# Altium PCB Stepper_control_board_v100.PcbDoc
Units mil, origin at the board's own origin, x right, y up, seen from the top; angles counter-clockwise.
Board outline 2510 x 1585 mil, 2 copper layers (Top Layer, Bottom Layer), stack 86.615 mil thick; 7 components, 0 nets, 98 pads, 18 vias.
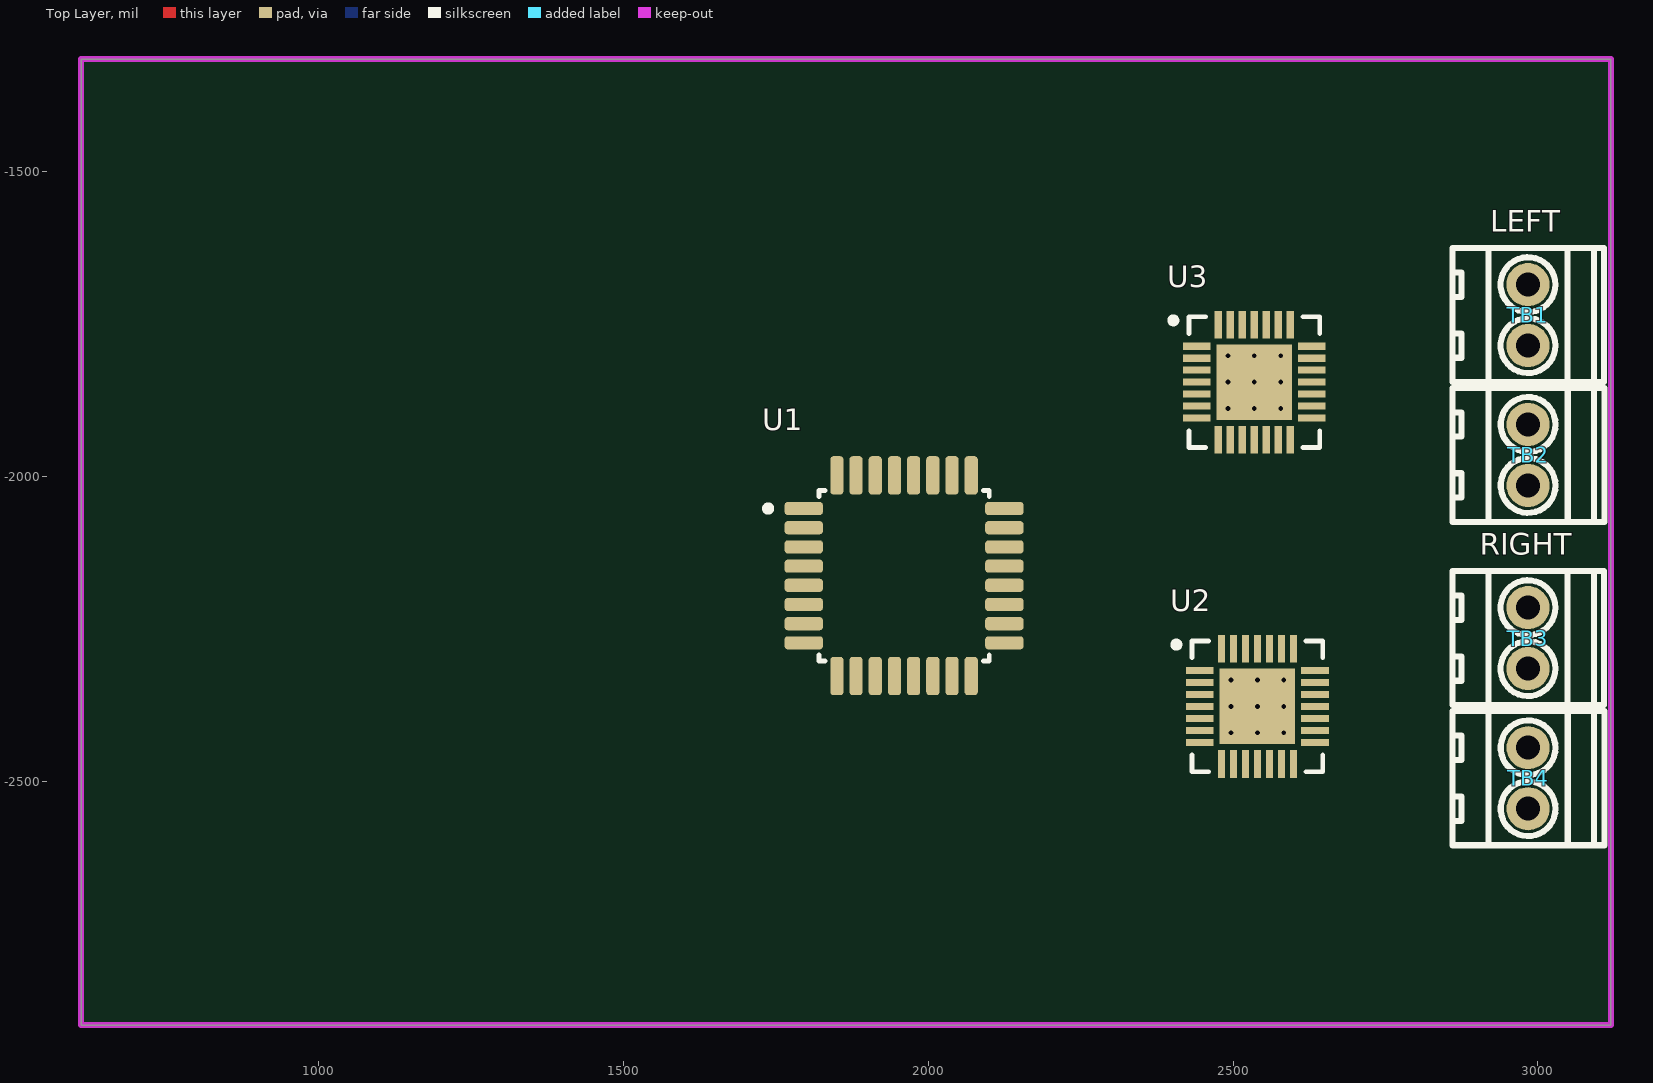
[diagram p0: Top Layer view]
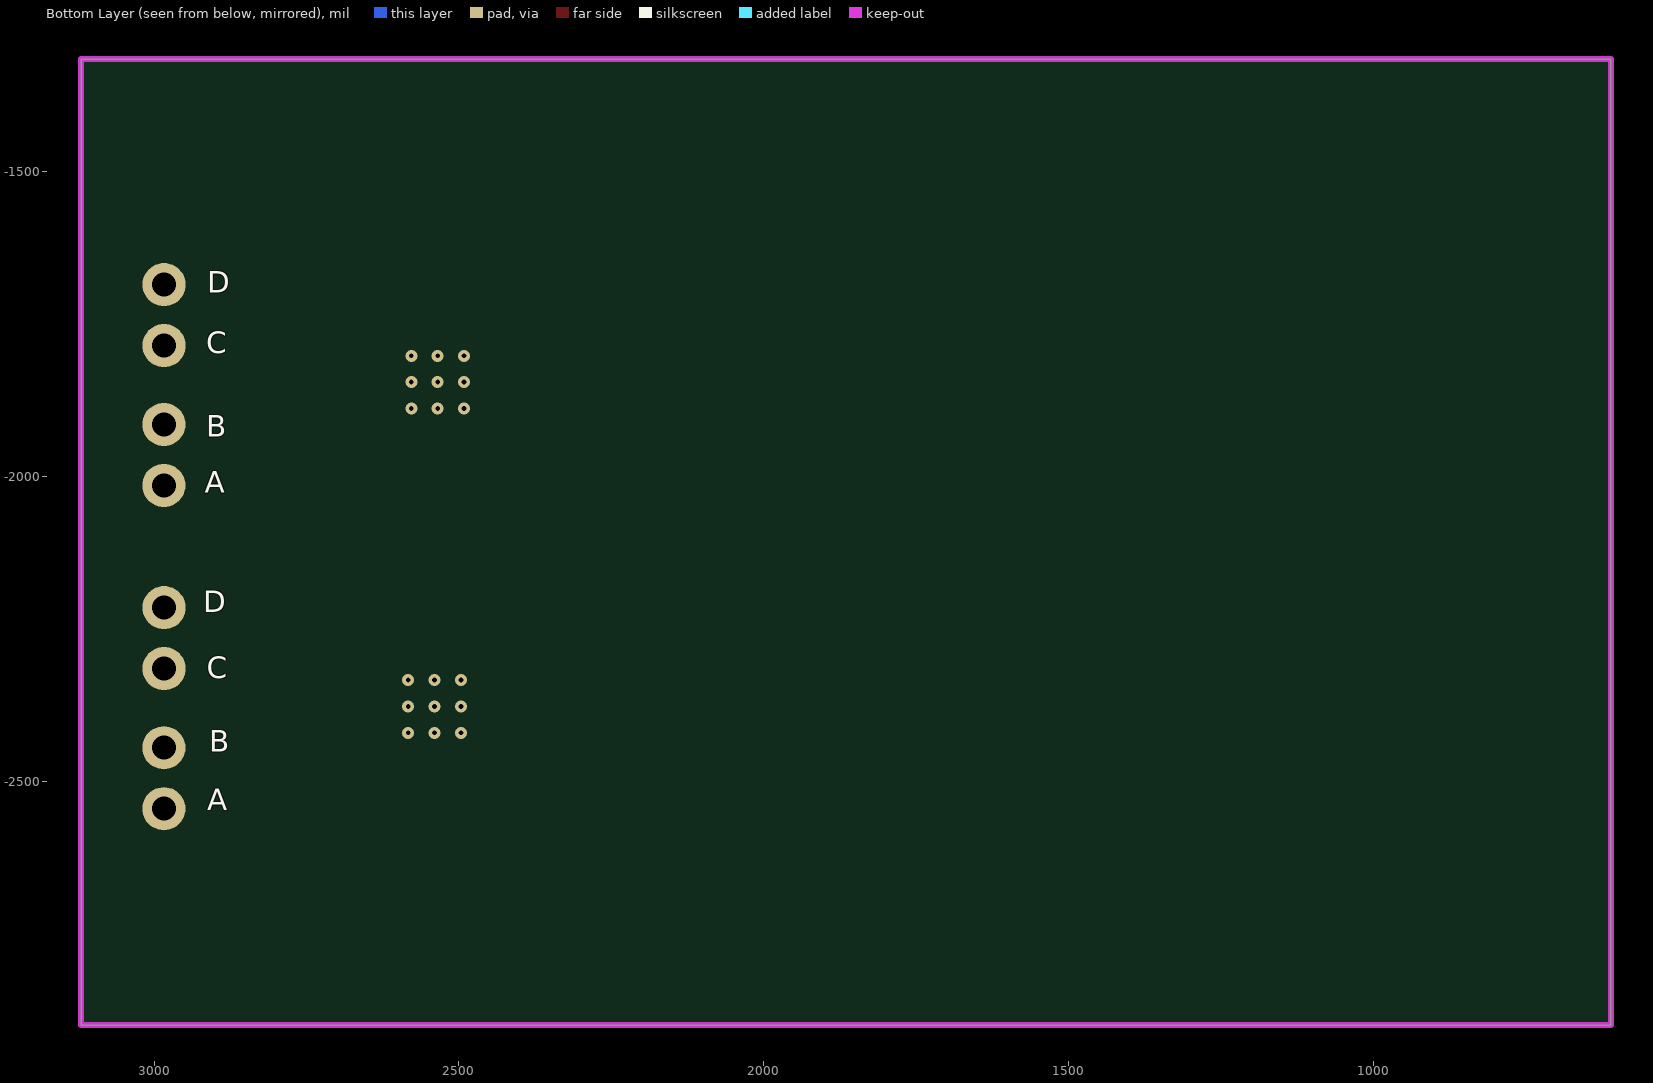
[diagram p1: Bottom Layer view, seen from below]

## Layer stack, top to bottom
Top Solder: solder mask 0.394, Solder Resist, Dk 3.5
Top Layer: signal copper 13.78
Dielectric 1: core 59.055, FR-4, Dk 4.2
Bottom Layer: signal copper 13.78
Solder Side: solder mask 0.394, Solder Resist, Dk 3.5

## Board outline
610,-2900 3120,-2900 3120,-1315 610,-1315

## Design rules (kind name [scope] priority, off if disabled: settings)
Clearance "Clearance Poly" [InPoly] p1: gap=16 ignorepadtopadclearanceinfootprint=FALSE except(0: Arc-Hole Track-Hole SMDPad-Hole THPad-Hole Via-Hole Fill-Hole Poly-Hole Region-Hole Text-Hole)
Clearance [All] p2: gap=4 ignorepadtopadclearanceinfootprint=FALSE
DiffPairsRouting [All] p1: maxlimit=10 minlimit=10 mostfreqgap=10 toplayer_minwidth=10 toplayer_maxwidth=10 toplayer_prefwidth=10 bottomlayer_minwidth=10 bottomlayer_maxwidth=10 bottomlayer_prefwidth=10 maxuncoupledlength=500
HoleSize [All] p1: absolutevalues=TRUE maxlimit=500 minlimit=1 maxpercent=80.000 minpercent=20.000
MinimumSolderMaskSliver [All] p1: minsoldermaskwidth=1
PolygonConnect PolygonConnect_Via [IsVia] p1: connectstyle=Direct reliefconductorwidth=10 reliefentries=4 polygonreliefangle="90 Angle" airgapwidth=10
PolygonConnect [All] p2: connectstyle=Relief reliefconductorwidth=16 reliefentries=4 polygonreliefangle="90 Angle" airgapwidth=16
RoutingVias [All] p1: holewidth=12 width=24 viastyle="Through Hole" minholewidth=12 minwidth=24 maxholewidth=12 maxwidth=24
SilkToSilkClearance [All] p1: silktosilkclearance=5
SilkToSolderMaskClearance [IsPad] p1: minsilkscreentomaskgap=5 clearancetoexposedcopper=TRUE
SolderMaskExpansion [All] p1: expansion=4
Width [All] p1: maxlimit=80 minlimit=10 preferedwidth=10
25 further rules are at their usual default settings.

## Components (designator, comment, footprint, x,y, rotation, side; value= is the part's Value field where it differs from the comment)
TB1 "282834-2" "SCREW TERMINAL 2.54" 2984,-1735 r90 top
TB2 "282834-2" "SCREW TERMINAL 2.54" 2984.25,-1964.48 r90 top
TB3 "282834-2" "SCREW TERMINAL 2.54" 2984,-2265 r90 top
TB4 "282834-2" "SCREW TERMINAL 2.54" 2984.25,-2494.88 r90 top
U1 "ATmega328PB/48PB/88PB/168PB" QFP32P80_900X900X120L60X37N 1960.24,-2162.6 r0 top
U2 "A4988SETTR-T" QFN50P500X500X100_HS-29N 2540,-2377 r0 top
U3 "A4988SETTR-T" QFN50P500X500X100_HS-29N 2535,-1845 r0 top

## Footprints (in the part's own frame and the unit in brackets; to place one, negate y for a bottom-side part, rotate by r counter-clockwise, add the part's x,y. Pads: shape width x height; smd on the part's side, far side on the other; paste and mask are expansions set on the pad)
QFN50P500X500X100_HS-29N [mm] "QFN, 28-Leads, Body 5,00x5,00mm, Pitch 0,50mm, Thermal Pad 3,15x3,15mm, IPC Medium Density"
  rect 1.15x0.3 smd: 1(-2.4,1.5) 2(-2.4,1) 3(-2.4,0.5) 4(-2.4,0) 5(-2.4,-0.5) 6(-2.4,-1) 7(-2.4,-1.5) 15(2.4,-1.5) 16(2.4,-1) 17(2.4,-0.5) 18(2.4,0) 19(2.4,0.5) 20(2.4,1) 21(2.4,1.5)
  rect 0.3x1.15 smd: 8(-1.5,-2.4) 9(-1,-2.4) 10(-0.5,-2.4) 11(0,-2.4) 12(0.5,-2.4) 13(1,-2.4) 14(1.5,-2.4) 22(1.5,2.4) 23(1,2.4) 24(0.5,2.4) 25(0,2.4) 26(-0.5,2.4) 27(-1,2.4) 28(-1.5,2.4)
  rect 3.15x3.15 smd: 29(0,0)
  silkscreen extent -3.5,-2.73 2.73,2.73, body extent -2.58,-2.57 2.57,2.58, height 1
QFP32P80_900X900X120L60X37N [mm] "Quad Flat Pack (QFP), 0.80 mm pitch; square, 8 pin X 8 pin, 7.00 mm L X 7.00 mm W X 1.20 mm H body"
  rrect51% 1.6x0.55 smd: 1(-4.18,2.8) 2(-4.18,2) 3(-4.18,1.2) 4(-4.18,0.4) 5(-4.18,-0.4) 6(-4.18,-1.2) 7(-4.18,-2) 8(-4.18,-2.8) 17(4.18,-2.8) 18(4.18,-2) 19(4.18,-1.2) 20(4.18,-0.4) 21(4.18,0.4) 22(4.18,1.2) 23(4.18,2) 24(4.18,2.8)
  rrect51% 0.55x1.6 smd: 9(-2.8,-4.18) 10(-2,-4.18) 11(-1.2,-4.18) 12(-0.4,-4.18) 13(0.4,-4.18) 14(1.2,-4.18) 15(2,-4.18) 16(2.8,-4.18) 25(2.8,4.18) 26(2,4.18) 27(1.2,4.18) 28(0.4,4.18) 29(-0.4,4.18) 30(-1.2,4.18) 31(-2,4.18) 32(-2.8,4.18)
  silkscreen extent -5.79,-3.55 3.55,3.55, body extent -4.8,-4.8 4.8,4.8, height 1.11
"SCREW TERMINAL 2.54" [mm]
  round 1.8 hole 1: 1(-1.27,0) 2(1.27,0)
  silkscreen extent -2.79,-3.17 2.79,3.15, body extent -2.77,-3.11 2.77,3.09, height 8.5

## Part data
TB1 TB2 TB3 TB4: library part 0100000003800, "TERM BLOCK 2POS SIDE ENT 2.54MM", Color=Green, Manufacturer="TE Connectivity AMP Connectors", Assembly=TH, Barcode=0100000003800, Category="Connectors, Interconnects", Datasheet URL=http://www.te.com/commerce/DocumentDelivery/DDEController?Action=srchrtrv&DocNm=282834&DocType=Customer+Drawing&DocLang=English, Family="TERMINAL BLOCK", Features=-, id=56, item_id=646, Manufacturer Part Number=282834-2, Mounting Type="Through Hole", Number of Levels=1, Part Type="Connectors, Electromechanical", Pitch="0.100\" (2.54mm)", Positions Per Level=2
U1: library part 3500000139108, "IC MCU 8BIT 8KB FLASH 32TQFP", Manufacturer="Microchip Technology", Manufacturer Part Number=ATMEGA88PB-AU, Package Case=32-TQFP, Voltage  Supply Vcc Vdd="1.8 V ~ 5.5 V", Assembly=SMD, Barcode=3500000139108, Category="Integrated Circuits (ICs)", Connectivity="I²C, SPI, UART/USART", Core Processor=AVR, Core Size=8-Bit, Datasheet URL=http://www.atmel.com/Images/Atmel-42176-ATmega48PB-88PB-168PB_Datasheet.pdf, Family=Microcontrollers, id=1142, item_id=12043, Number of I O=27, Part Type="Integrated Circuits", Peripherals="Brown-out Detect/Reset, POR, PWM, WDT", Program Memory Size="8KB (4K x 16)", Program Memory Type=FLASH, Speed=20MHz
U2 U3: library part 0100000079072, "IC MOTOR DRIVER PAR 28QFN", Current  Output=2A, Manufacturer="Allegro MicroSystems, LLC", Package Case="28-VFQFN Exposed Pad", Voltage Load="8 V ~ 35 V", Voltage  Supply="3 V ~ 5.5 V", Applications="General Purpose", Assembly=SMD, Barcode=0100000079072, Category="Integrated Circuits (ICs)", Datasheet URL=http://www.allegromicro.com/en/Products/Part_Numbers/4988/4988.pdf, Family="Motor Drivers, Controllers", Function="Driver - Fully Integrated, Control and Power Stage", id=994, Interface=Step/Direction, item_id=7051, Manufacturer Part Number=A4988SETTR-T, Motor Type AC DC=-, Motor Type  Stepper=Bipolar, Output Configuration="Half Bridge (4)", Part Type="Integrated Circuits", Technology=DMOS

## Via types
v1: diameter 19.68, hole 7.87, Top Layer to Bottom Layer, tented bottom, 18 vias

## Nets (pads, with @x,y where several pads share a name; then routed paths per layer and width w, separated by ;. In a path a pad name is that pad's centre, name@x,y a point inside that pad or via, vN(x,y) a via of type N, cw(c..) or ccw(c..) an arc to the next point about the centre after c; other vN are vias at no path point)
pads on no net: TB1.1 TB1.2 TB2.1 TB2.2 TB3.1 TB3.2 TB4.1 TB4.2 U1.1 U1.2 U1.3 U1.4 U1.5 U1.6 U1.7 U1.8 U1.9 U1.10 U1.11 U1.12 U1.13 U1.14 U1.15 U1.16 U1.17 U1.18 U1.19 U1.20 U1.21 U1.22 U1.23 U1.24 U1.25 U1.26 U1.27 U1.28 U1.29 U1.30 U1.31 U1.32 U2.1 U2.2 U2.3 U2.4 U2.5 U2.6 U2.7 U2.8 U2.9 U2.10 U2.11 U2.12 U2.13 U2.14 U2.15 U2.16 U2.17 U2.18 U2.19 U2.20 U2.21 U2.22 U2.23 U2.24 U2.25 U2.26 U2.27 U2.28 U2.29 U3.1 U3.2 U3.3 U3.4 U3.5 U3.6 U3.7 U3.8 U3.9 U3.10 U3.11 U3.12 U3.13 U3.14 U3.15 U3.16 U3.17 U3.18 U3.19 U3.20 U3.21 U3.22 U3.23 U3.24 U3.25 U3.26 U3.27 U3.28 U3.29
copper on no net:
  other v1: 2496.69,-2420.31 2540,-2420.31 2583.31,-2420.31 2496.69,-2377 2540,-2377 2583.31,-2377 2496.69,-2333.69 2540,-2333.69 2583.31,-2333.69 2491.69,-1888.31 2535,-1888.31 2578.31,-1888.31 2491.69,-1845 2535,-1845 2578.31,-1845 2491.69,-1801.69 2535,-1801.69 2578.31,-1801.69

## Keep-outs
Keep-Out Layer:
  the board outline again, w10

## Silkscreen, mask and mechanical layers (free items; w line width, h text height)
Top Overlay:
  text "LEFT" at 2922,-1610 h60
  text "RIGHT" at 2905,-2140 h60
Bottom Overlay:
  text "D" at 2913,-1710 h60
  text "C" at 2915,-1809 h60
  text "B" at 2915,-1946 h60
  text "A" at 2917,-2038 h60
  text "D" at 2920,-2234 h60
  text "C" at 2914,-2342 h60
  text "B" at 2910,-2463 h60
  text "A" at 2913,-2559 h60